# EAGLE board contra1567 (EAGLE 7.5.0)

Size 160 x 100 mm. Coordinates in mm from the lower left corner, seen from the top.
Outline: 0,0 160,0 160,100 0,100 0,0
Copper layers (1*16): Top 0.035mm / dielectric 1.5mm / Bottom 0.035mm
Design rules "default": minimum track width 10mil, minimum drill 24mil, track to track 8mil, track to pad 8mil, pad to pad 8mil, via to via 8mil, smd to smd 8mil, copper to edge 40mil, drill to drill 8mil, minimum pad ring 10mil, minimum via ring 8mil, stop-mask expansion 4mil, vias tented up to drill 0mil, thermal gap 10mil

## Footprints (pad centres in the part's own frame; a part is rotated, then mirrored left to right if it is on the bottom)
CAP-3-PT-ZERO-3UF-250V-FILM = drill 0.9 pad 2.184: 1 -11.25,0; 2 11.25,0
CAP-ZERO-PT-ZERO-22UF-250V-FILM = drill 0.9 pad 2.184: 1 -3.75,0; 2 3.75,0
DO35-7 = drill 0.813 pad 2.184: A 3.81,0; C -3.81,0
DO41 = drill 1.118 pad 2.184: A 5.08,0; C -5.08,0
AWG18 = drill 1.3 pad 3.81: P$1 0,0
3006P = drill 0.8 pad 2.184: 1 -6.477,1.27; 2 1.143,-1.27; 3 6.223,1.27
44PINEDGE = smd 1.905 x 8.255: 1 -41.605,4.826; 2 -37.643,4.826; 3 -33.68,4.826; 4 -29.718,4.826; 5 -25.756,4.826; 6 -21.793,4.826; 7 -17.831,4.826; 8 -13.868,4.826; 9 -9.906,4.826; 10 -5.944,4.826; 11 -1.981,4.826; 12 1.981,4.826; 13 5.944,4.826; 14 9.906,4.826; 15 13.868,4.826; 16 17.831,4.826; 17 21.793,4.826; 18 25.756,4.826; 19 29.718,4.826; 20 33.68,4.826; 21 37.643,4.826; 22 41.605,4.826 | smd 1.905 x 8.255 bottom: A -41.605,4.826; B -37.643,4.826; C -33.68,4.826; D -29.718,4.826; E -25.756,4.826; F -21.793,4.826; H -17.831,4.826; J -13.868,4.826; K -9.906,4.826; L -5.944,4.826; M -1.981,4.826; N 1.981,4.826; P 5.944,4.826; R 9.906,4.826; S 13.868,4.826; T 17.831,4.826; U 21.793,4.826; V 25.756,4.826; W 29.718,4.826; X 33.68,4.826; Y 37.643,4.826; Z 41.605,4.826
TO92 = drill 0.813 octagon: 1 1.27,-1.27; 2 1.27,1.27; 3 -1.27,1.27
TO18 = drill 0.813 pad 1.676: 1 1.905,0; 2 0,1.905; 3 -1.905,0
TO3 = drill 1.194 pad 3.81 long: B -1.778,5.461; E -1.778,-5.461 | drill 4.115 pad 6.477: C 15.113,0; C/ -15.113,0
R_THREEWATT = drill 1 pad 2.184: 1 -11,0; 2 11,0
R_TWOWATT = drill 1 pad 2.184: 1 -8.75,0; 2 8.75,0
R_HALFWATT = drill 0.9 pad 2.184: 1 -5.85,0; 2 5.85,0
R_QUARTERWATT = drill 0.813 pad 1.676: 1 -4.5,0; 2 4.5,0
R_ONEWATT = drill 1 pad 2.184: 1 -8,0; 2 8,0

## Placement (x,y rotation side)
C1  3.3UF 5%  [CAP-3-PT-ZERO-3UF-250V-FILM]  -110.49,8.89 0 top  (outside the outline)
C2  3.3UF 5%  [CAP-3-PT-ZERO-3UF-250V-FILM]  -29.21,35.56 0 top  (outside the outline)
C3  0.022 uF  [CAP-ZERO-PT-ZERO-22UF-250V-FILM]  -124.46,50.8 0 top  (outside the outline)
C4  3.3UF 5%  [CAP-3-PT-ZERO-3UF-250V-FILM]  -62.23,35.56 0 top  (outside the outline)
C5  0.022 uF  [CAP-ZERO-PT-ZERO-22UF-250V-FILM]  -22.86,66.04 0 top  (outside the outline)
C6  0.022 uF  [CAP-ZERO-PT-ZERO-22UF-250V-FILM]  -38.1,66.04 0 top  (outside the outline)
C7  0.022 uF  [CAP-ZERO-PT-ZERO-22UF-250V-FILM]  -53.34,66.04 0 top  (outside the outline)
D1  1N4148  [DO35-7]  -36.83,133.35 0 top  (outside the outline)
D2  1N4148  [DO35-7]  -50.8,133.35 0 top  (outside the outline)
D3  1N4148  [DO35-7]  -64.77,133.35 0 top  (outside the outline)
D4  1N4148  [DO35-7]  -78.74,133.35 0 top  (outside the outline)
D5  1N4148  [DO35-7]  -92.71,133.35 0 top  (outside the outline)
D6  1N4148  [DO35-7]  -106.68,133.35 0 top  (outside the outline)
D7  1N4148  [DO35-7]  -120.65,133.35 0 top  (outside the outline)
D8  1N4736A  [DO41]  -124.46,124.46 0 top  (outside the outline)
D9  1N4736A  [DO41]  -21.59,134.62 0 top  (outside the outline)
D10  1N4148  [DO35-7]  -134.62,133.35 0 top  (outside the outline)
D11  1N4148  [DO35-7]  -21.59,143.51 0 top  (outside the outline)
D12  1N4148  [DO35-7]  -35.56,143.51 0 top  (outside the outline)
D13  1N4148  [DO35-7]  -49.53,143.51 0 top  (outside the outline)
D14  1N4148  [DO35-7]  -63.5,143.51 0 top  (outside the outline)
D15  1N4148  [DO35-7]  -77.47,143.51 0 top  (outside the outline)
D16  1N4148  [DO35-7]  -91.44,143.51 0 top  (outside the outline)
J1  COIL 1  [AWG18]  -133.35,91.44 0 top  (outside the outline)
J2  LOAD RESISTOR  [AWG18]  -97.79,91.44 0 top  (outside the outline)
J6  COIL 1  [AWG18]  -21.59,104.14 0 top  (outside the outline)
J7  LOAD RESISTOR  [AWG18]  -121.92,91.44 0 top  (outside the outline)
P1  25 K  [3006P]  -82.55,78.74 0 top  (outside the outline)
P2  10 K  [3006P]  -104.14,78.74 0 top  (outside the outline)
P3  200  [3006P]  -125.73,78.74 0 top  (outside the outline)
P4  100 K  [3006P]  -24.13,91.44 0 top  (outside the outline)
P5  20 K  [3006P]  -45.72,91.44 0 top  (outside the outline)
P6  44PINEDGE  [44PINEDGE]  -68.58,45.72 0 top  (outside the outline)
P7  20  [3006P]  -67.31,91.44 0 top  (outside the outline)
Q1  2N3904  [TO92]  -52.07,124.46 0 top  (outside the outline)
Q2  2N3904  [TO92]  -59.69,124.46 0 top  (outside the outline)
Q3  2N3904  [TO92]  -67.31,124.46 0 top  (outside the outline)
Q4  2N3904  [TO92]  -74.93,124.46 0 top  (outside the outline)
Q5  2N3904  [TO92]  -82.55,124.46 0 top  (outside the outline)
Q6  2N3904  [TO92]  -90.17,124.46 0 top  (outside the outline)
Q7  2N3904  [TO92]  -97.79,124.46 0 top  (outside the outline)
Q8  2N2907  [TO18]  -113.03,143.51 0 top  (outside the outline)
Q9  2N3906  [TO92]  -105.41,124.46 0 top  (outside the outline)
Q10  2N2907  [TO18]  -132.08,143.51 0 top  (outside the outline)
Q11  MJ10007  [TO3]  -33.02,13.97 0 top  (outside the outline)
Q12  2N3906  [TO92]  -113.03,124.46 0 top  (outside the outline)
Q13  MJ10007  [TO3]  -73.66,13.97 0 top  (outside the outline)
R1  3.3uF  [R_THREEWATT]  -72.39,66.04 0 top  (outside the outline)
R2  3.3K 5%  [R_TWOWATT]  -120.65,66.04 0 top  (outside the outline)
R3  3.3K 5%  [R_TWOWATT]  -22.86,78.74 0 top  (outside the outline)
R4  10 K 5%  [R_HALFWATT]  -105.41,102.87 0 top  (outside the outline)
R5  46.4K  [R_QUARTERWATT]  -19.05,124.46 0 top  (outside the outline)
R6  6.81K 1%  [R_HALFWATT]  -72.39,102.87 0 top  (outside the outline)
R7  33.2 K 1%  [R_HALFWATT]  -36.83,102.87 0 top  (outside the outline)
R8  29.4K  [R_QUARTERWATT]  -132.08,114.3 0 top  (outside the outline)
R9  6.81K 1%  [R_HALFWATT]  -88.9,102.87 0 top  (outside the outline)
R10  33.2 K 1%  [R_HALFWATT]  -55.88,102.87 0 top  (outside the outline)
R11  4.64K  [R_QUARTERWATT]  -30.48,124.46 0 top  (outside the outline)
R12  2.94K  [R_QUARTERWATT]  -41.91,124.46 0 top  (outside the outline)
R13  3.3  [R_THREEWATT]  -97.79,66.04 0 top  (outside the outline)
R14  1.96 K 1 %  [R_QUARTERWATT]  -26.67,114.3 0 top  (outside the outline)
R15  330 5%  [R_ONEWATT]  -43.18,78.74 0 top  (outside the outline)
R16  10 K 5%  [R_HALFWATT]  -121.92,102.87 0 top  (outside the outline)
R17  274 K 1%  [R_QUARTERWATT]  -62.23,114.3 0 top  (outside the outline)
R18  1.96 K 1 %  [R_QUARTERWATT]  -45.72,114.3 0 top  (outside the outline)
R19  1 K 1%  [R_QUARTERWATT]  -107.95,114.3 0 top  (outside the outline)
R20  137 K 1%  [R_QUARTERWATT]  -78.74,114.3 0 top  (outside the outline)
R21  1 K 1%  [R_QUARTERWATT]  -120.65,114.3 0 top  (outside the outline)
R22  330 5%  [R_ONEWATT]  -62.23,78.74 0 top  (outside the outline)
R23  274 K 1%  [R_QUARTERWATT]  -95.25,114.3 0 top  (outside the outline)

## Library data of the parts
C1 C2 C4 R1 = keiths; PN: ECQ-E2335JF
C3 C5-C7 = keiths; PN: ECQ-E2223JFB
D1-D7 D10-D16 = keiths; PN: 1N4148
D8 D9 = keiths; PN: 1N4736A
J1 J2 J6 J7 P6 = keiths
P1 = keiths; PN: 3006P-1-253LF
P2 = keiths; PN: 3006P-1-103LF
P3 = keiths; PN: 3006P-1-201LF
P4 = keiths; PN: 3006P-1-104LF
P5 = keiths; PN: 3006P-1-203LF
P7 = keiths; PN: 3006P-1-200LF
Q1-Q7 = keiths; PN: 2N3904
Q8 Q10 = keiths; PN: 2N2907A
Q9 Q12 = keiths; PN: 2N3906
Q11 Q13 = keiths; PN: MJ10007
R2 R3 = keiths; PN: RR02J3K3TB
R4 R16 = keiths; PN: MF1/2LCT52R103J
R5 = keiths; PN: RNF14FTD46K4
R6 R9 = keiths; PN: MFS1/2DCT52R6811F
R7 R10 = keiths; PN: SFR16S0003322FR500
R8 = keiths; PN: RNF14FTD29K4
R11 = keiths; PN: RNF14FTD4K64
R12 = keiths; PN: RNF14FTD2K94
R13 = keiths; PN: PR03000203308JAC00
R14 R18 = keiths; PN: RNF14FTD1K96
R15 R22 = keiths; PN: SFR16S0003300JA500
R17 R23 = keiths; PN: MFR-25FBF52-274K
R19 R21 = keiths; PN: MFR-25FRF52-1K
R20 = keiths; PN: MFR-25FBF52-137K

## Nets
+5V: P6.F
+10V: P6.A
+50V: P6.E R2.1 R3.1 R6.1 R9.1
-10V: C5.1 C7.1 Q1.3 Q2.3 Q4.3 Q6.3 R4.2 R15.2 R16.2 R18.2 R22.2
-15V: P6.C
-150V: P6.V
CATHODE: P6.Z
GND: P1.2 P1.3 P2.2 P2.3 P6.D R1.2 R5.1 R8.1 R11.1 R12.1 R13.2 R14.2
J_IN: P6.J
N$1: J1.P$1 Q13.C Q13.C/
N$2: C1.1 J2.P$1 Q13.E
N$3: C1.2 R1.1
N$4: P1.1 Q1.1 Q1.2 Q2.2 Q4.2 R5.2 R8.2
N$5: D16.A Q8.1 Q13.B R2.2
N$6: Q3.2 R21.1
N$7: C3.2 D15.A D16.C Q8.2 R4.1
N$8: C5.2 Q8.3 R22.1
N$9: Q4.1 Q12.1
N$10: D14.A D15.C
N$11: D13.A D14.C
N$12: D12.A D13.C
N$13: D11.A D12.C
N$14: D10.A D11.C
N$15: C3.1 D8.A D10.C Q9.3
N$16: Q3.1 Q9.2 R7.2
N$17: D8.C R7.1 R9.2
N$18: C2.1 P5.1 P7.2 P7.3 R21.2
N$19: Q3.3 Q5.1 Q7.3
N$20: D9.C R6.2 R10.1
N$21: Q2.1 Q9.1
N$22: P3.1 P4.1 R14.1 R20.2 R23.1
N$23: Q5.3
N$25: Q7.1 Q12.2 R10.2
N$26: J6.P$1 Q11.C Q11.C/
N$27: C4.1 J7.P$1 Q11.E
N$29: P2.1 Q5.2 Q6.1 Q6.2 R11.2 R12.2
N$30: C4.2 R13.1
N$31: D2.C Q10.1 Q11.B R3.2
N$33: C6.1 D1.C D2.A Q10.2 R16.1
N$34: C7.2 Q10.3 R15.1
N$35: D1.A D3.C
N$36: D3.A D4.C
N$37: D4.A D5.C
N$38: D5.A D6.C
N$39: D6.A D7.C
N$40: C6.2 D7.A D9.A Q12.3
N$43: Q7.2 R19.2
N$44: P3.3 P4.2 P4.3 R17.1 R18.1 R20.1
P_IN: P6.P
U_IN: P6.U
W_DIFF_IN: P3.2 P5.2 P5.3 R17.2 R19.1 R23.2
X_IN: P6.X
Z_DIFF_IN: C2.2 P7.1

## Tracks (layer width: path | path; a pad name or v marks a point on that pad's centre or on a via)
+50V  (4 unrouted)
-10V  (10 unrouted)
GND  (11 unrouted)
N$1  (2 unrouted)
N$2  (2 unrouted)
N$3  (1 unrouted)
N$4  (6 unrouted)
N$5  (3 unrouted)
N$6  (1 unrouted)
N$7  (4 unrouted)
N$8  (2 unrouted)
N$9  (1 unrouted)
N$10  (1 unrouted)
N$11  (1 unrouted)
N$12  (1 unrouted)
N$13  (1 unrouted)
N$14  (1 unrouted)
N$15  (3 unrouted)
N$16  (2 unrouted)
N$17  (2 unrouted)
N$18  (4 unrouted)
N$19  (2 unrouted)
N$20  (2 unrouted)
N$21  (1 unrouted)
N$22  (4 unrouted)
N$25  (2 unrouted)
N$26  (2 unrouted)
N$27  (2 unrouted)
N$29  (5 unrouted)
N$30  (1 unrouted)
N$31  (3 unrouted)
N$33  (4 unrouted)
N$34  (2 unrouted)
N$35  (1 unrouted)
N$36  (1 unrouted)
N$37  (1 unrouted)
N$38  (1 unrouted)
N$39  (1 unrouted)
N$40  (3 unrouted)
N$43  (1 unrouted)
N$44  (5 unrouted)
W_DIFF_IN  (5 unrouted)
Z_DIFF_IN  (1 unrouted)